# Altium PCB Test Mux.PCBDOC
Units mm, origin at the board's own origin, x right, y up, seen from the top; angles counter-clockwise.
Board outline 299.72 x 199.9 mm, 2 copper layers (Top Layer, Bottom Layer); 17 components, 56 nets, 32 pads, 0 vias.
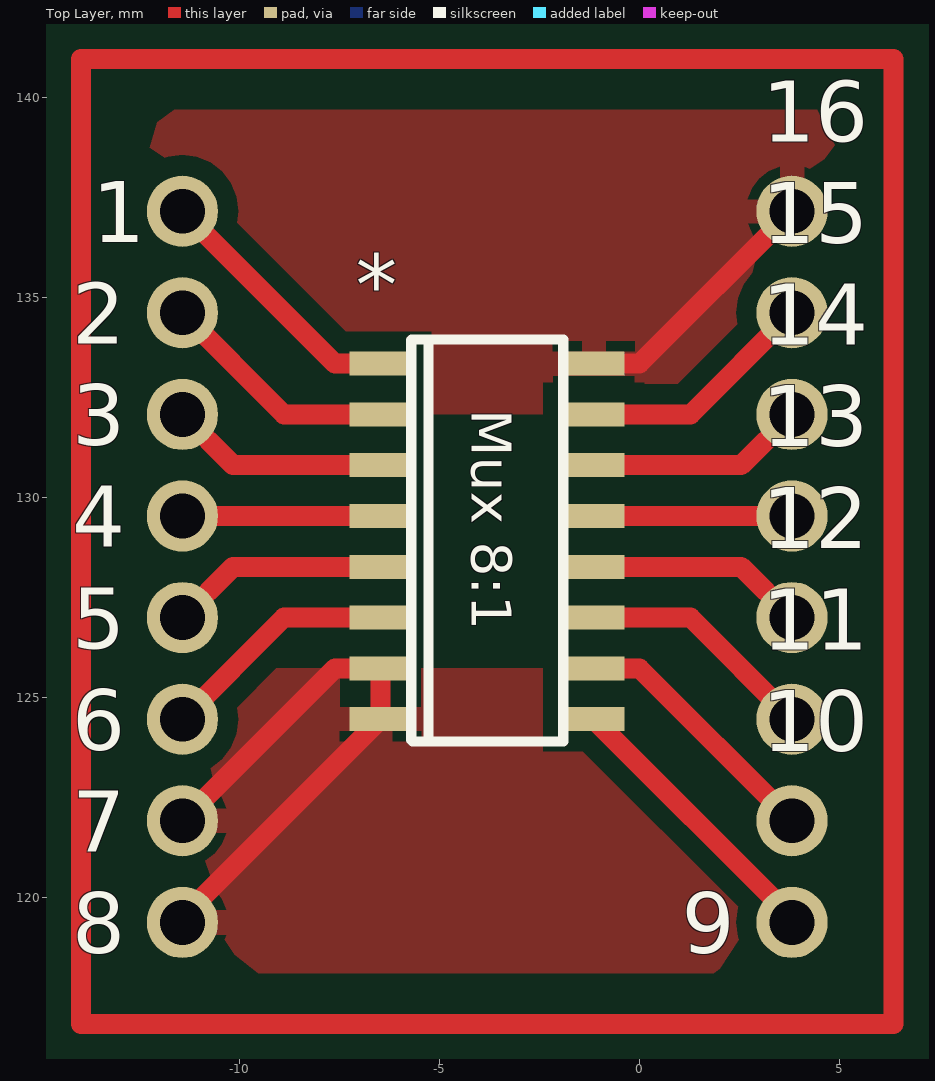
[diagram p0: Top Layer view]
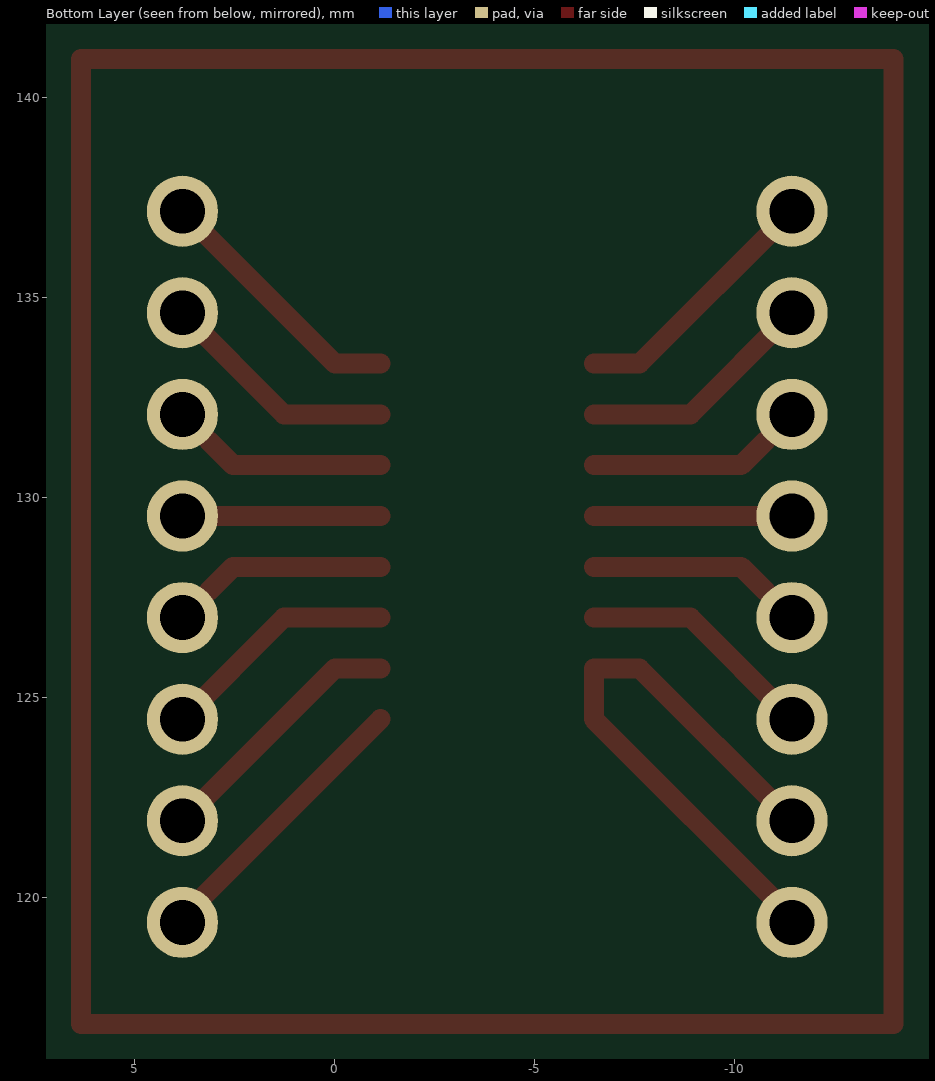
[diagram p1: Bottom Layer view, seen from below]

## Layer stack, top to bottom
Top Solder: solder mask 0.0102, Solder Resist, Dk 3.5
Top Layer: signal copper 0.0356
Dielectric1: dielectric 0.32, FR-4, Dk 4.8
Bottom Layer: signal copper 0.0356
Bottom Solder: solder mask 0.0102, Solder Resist, Dk 3.5

## Board outline
-41.96,-47.66 257.76,-47.66 257.76,152.238 -41.96,152.238

## Design rules (kind name [scope] priority, off if disabled: settings)
Clearance Clearance_bottom_polygon [OnLayer('Bottom Layer') Or OnLayer('Multi-Layer') vs OnLayer('Bottom Layer')  And  InPoly] p1: gap=0.508
Clearance Clearance_top_polygon [OnLayer('Top Layer')  Or OnLayer('Multi-Layer') vs OnLayer('Top Layer') And InPoly] p2: gap=0.508
Clearance Clearance_bottom [OnLayer('Bottom Layer') Or OnLayer('Multi-Layer') vs OnLayer('Bottom Layer')  And Not InPoly] p3: gap=0.254
Clearance Clearance_top [OnLayer('Top Layer')  Or OnLayer('Multi-Layer') vs OnLayer('Top Layer') And Not InPoly] p4: gap=0.254
Clearance Clearance_pad_to_pad [OnLayer('Multi-Layer') vs OnLayer('Multi-Layer')] p5: gap=0.254
ComponentClearance ComponentClearance_bottom [OnLayer('Bottom Overlay') vs OnLayer('Bottom Overlay')] p1: gap=0 collisioncheckmode=3 verticalgap=0.254 showdistances=FALSE
ComponentClearance ComponentClearance_top [OnLayer('Top Overlay') vs OnLayer('Top Overlay')] p2: gap=0 collisioncheckmode=3 verticalgap=0.254 showdistances=FALSE
FabricationTestPointUsage TestPointUsage [All] p1: valid=0 allowmultiple=FALSE
FabricationTestpoint Testpoint [All] p1: side=3 testpointundercomponent=TRUE minsize=1.016 maxsize=2.54 preferedsize=1.524 minholesize=0 maxholesize=1.016 preferedholesize=0.813 testpointgrid=0.025 allowsidetop=TRUE allowsidebottom=TRUE usegrid=TRUE gridtolerance=0
HoleSize [All] p1: absolutevalues=TRUE maxlimit=25.4 minlimit=0.406 maxpercent=80.000 minpercent=20.000
MinimumAnnularRing [PadXSize_AllLayers = PadYSize_AllLayers] p1: minimumring=0.203
PermittedLayers [All] p1: toplayerpermitted=TRUE bottomlayerpermitted=TRUE
PolygonConnect [All] p1: connectstyle=Relief reliefconductorwidth=0.61 reliefentries=4 polygonreliefangle="90 Angle" airgapwidth=0.254
RoutingVias [All] p1: holewidth=0.6 width=1.2 viastyle="Through Hole" minholewidth=0.4 minwidth=0.8 maxholewidth=0.6 maxwidth=10
SMDToPlane [All] p1: distance=0
SolderMaskExpansion [All] p1: expansion=0.102
ViasUnderSMD [All] p1: allowed=FALSE
Width Width_mechanical [OnLayer('Mechanical 1') or OnLayer(' Mechanical 4')] p1: maxlimit=0.254 minlimit=0.254 preferedwidth=0.254
Width Width_botom_top [OnLayer('Bottom Layer') or OnLayer('Top Layer')] p2: maxlimit=254 minlimit=0.254 preferedwidth=0.813 toplayer_minwidth=0.5 minimp=50.000000 maximp=50.000000 favimp=50.000000
25 further rules are at their usual default settings.

## Components (designator, comment, footprint, x,y, rotation, side; value= is the part's Value field where it differs from the comment)
1 "PIN" TESTPOINT -11.43,137.16 r90 top
2 "PIN" TESTPOINT -11.43,134.62 r90 top
3 "PIN" TESTPOINT -11.43,132.08 r90 top
4 "PIN" TESTPOINT -11.43,129.54 r90 top
5 "PIN" TESTPOINT -11.43,127 r90 top
6 "PIN" TESTPOINT -11.43,124.46 r90 top
7 "PIN" TESTPOINT -11.43,121.92 r90 top
8 "PIN" TESTPOINT -11.43,119.38 r90 top
9 "PIN" TESTPOINT 3.81,119.38 r90 top
10 "PIN" TESTPOINT 3.81,121.92 r0 top
11 "PIN" TESTPOINT 3.81,124.46 r0 top
12 "PIN" TESTPOINT 3.81,127 r0 top
13 "PIN" TESTPOINT 3.81,129.54 r0 top
14 "PIN" TESTPOINT 3.81,132.08 r0 top
15 "PIN" TESTPOINT 3.81,134.62 r0 top
16 "PIN" TESTPOINT 3.81,137.16 r0 top
* "MUX 8:1 CD4051B" "MUX 8:1*" -3.81,129.54 r270 top

## Footprints (in the part's own frame and the unit in brackets; to place one, negate y for a bottom-side part, rotate by r counter-clockwise, add the part's x,y. Pads: shape width x height; smd on the part's side, far side on the other; paste and mask are expansions set on the pad)
"MUX 8:1*" [mm]
  rect 0.6x1.54 smd: 1(-3.81,-2.667) 2(-2.54,-2.667) 3(-1.27,-2.667) 4(0,-2.667) 5(1.27,-2.667) 6(2.54,-2.667) 7(3.81,-2.667) 8(5.08,-2.667) 9(5.08,2.667) 10(3.81,2.667) 11(2.54,2.667) 12(1.27,2.667) 13(0,2.667) 14(-1.27,2.667) 15(-2.54,2.667) 16(-3.81,2.667)
  silkscreen extent -4.41,-1.9 5.64,1.9
TESTPOINT [mil]
  round 70 hole 44: 1(0,0)

## Nets (pads, with @x,y where several pads share a name; then routed paths per layer and width w, separated by ;. In a path a pad name is that pad's centre, name@x,y a point inside that pad or via, vN(x,y) a via of type N, cw(c..) or ccw(c..) an arc to the next point about the centre after c; other vN are vias at no path point)
1: 1.1 *.1 | length 6.5
  Top Layer w0.5: 1.1 -7.62,133.35 *.1
2: 2.1 *.2 | length 6
  Top Layer w0.5: 2.1 -8.89,132.08 *.2
3: 3.1 *.3 | length 5.5
  Top Layer w0.5: 3.1 -10.16,130.81 *.3
3.3V: 
4: 4.1 *.4 | length 5
  Top Layer w0.5: 4.1 *.4
5: 5.1 *.5 | length 5.5
  Top Layer w0.5: 5.1 -10.16,128.27 *.5
6: 6.1 *.6 | length 6
  Top Layer w0.5: 6.1 -8.89,127 *.6
7: 7.1 8.1 *.7 *.8 | length 14.9
  Top Layer w0.5: 8.1 -11.43,119.507 *.8 *.7 -7.62,125.73 7.1
9: 9.1 *.9 | length 7.1
  Top Layer w0.5: *.9 3.81,119.507 9.1
10: 10.1 *.10 | length 6.5
  Top Layer w0.5: *.10 0,125.73 10.1
11: 11.1 *.11 | length 6
  Top Layer w0.5: *.11 1.27,127 11.1
12: 12.1 *.12 | length 5.5
  Top Layer w0.5: *.12 2.54,128.27 12.1
13: 13.1 *.13 | length 5
  Top Layer w0.5: *.13 13.1
14: 14.1 *.14 | length 5.5
  Top Layer w0.5: *.14 2.54,130.81 14.1
15: 15.1 *.15 | length 6
  Top Layer w0.5: *.15 1.27,132.08 15.1
16: 16.1 *.16 | length 6.5
  Top Layer w0.5: *.16 0,133.35 16.1
_CS: 
_INT: 
_RESET: 
A: 
A0: 
A1: 
A2: 
A3: 
A4: 
B: 
C: 
CAN+: 
CAN-: 
D5: 
D6: 
D7: 
D8: 
D9: 
GND: 
"Net0R 3.3V 1_2": 
"Net0R 3.3V 2_2": 
"Net0R 5V 1_2": 
"Net0R 5V 2_2": 
NetC0_2: 
NetC1_2: 
NetCAN_1: 
NetCAN_4: 
NetLed5V_A: 
NetLed9V_A: 
SCK: 
SI: 
SO: 
TRIG: 
"TRIG BACK": 
"TRIG FRONT LEFT": 
"TRIG FRONT RIGHT": 
"TRIG LEFT": 
"TRIG RIGHT": 
"VCC 5V": 
"VCC 9V": 
copper on no net: | length 88.9
  Top Layer w0.5: -13.97,116.84 -13.97,140.97 6.35,140.97 6.35,116.84 -13.97,116.84

## Polygon pours and split planes (outlines as drawn)
16 on Top Layer "Top Layer-No Net" (solid, pour order 4): 5.08,139.7 -12.7,139.7 -12.7,133.35 -11.43,132.08 5.08,132.08 5.08,139.7
7 on Top Layer "Top Layer-No Net" (solid, pour order 2): -12.7,118.11 5.08,118.11 5.08,125.73 -12.7,125.73 -12.7,118.11

## Keep-outs
Keep-Out Layer:
  rectangle: -41,-44 -36,156
  rectangle: -36,151 249,156
  rectangle: 249,-39 254,156
  rectangle: -36,-44 254,-39

## Text inside footprints (layer, text, board x,y; h text height)
*: Top Overlay "Mux 8:1" at -4.191,132.207 h1 r270